# Altium PCB PCBinterface_cmv4000-de2.PcbDoc
Units mm, origin at the board's own origin, x right, y up, seen from the top; angles counter-clockwise.
Board outline 46.86 x 61.47 mm, 2 copper layers (Top Layer, Bottom Layer); 2 components, 20 nets, 82 pads, 0 vias.
Unrouted connection lines stored in the file: 1.
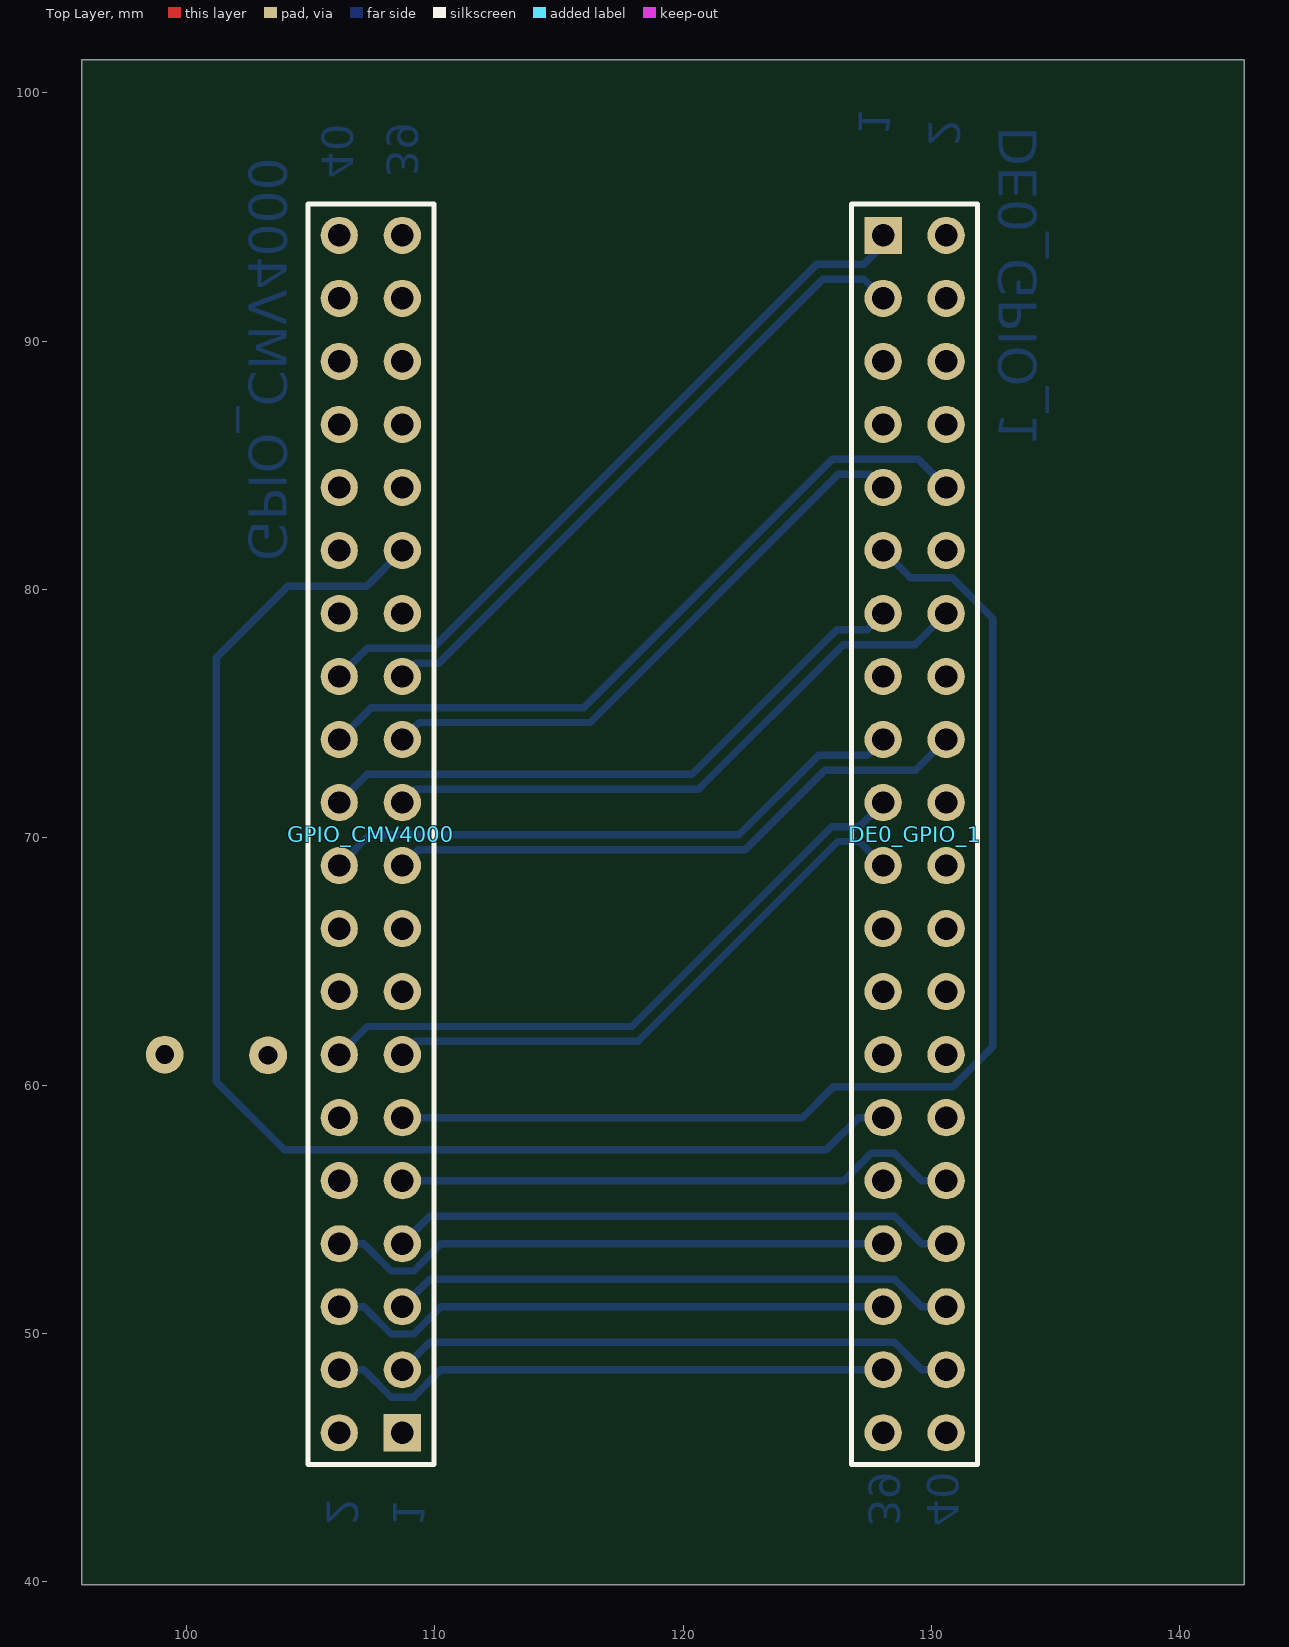
[diagram p0: Top Layer view]
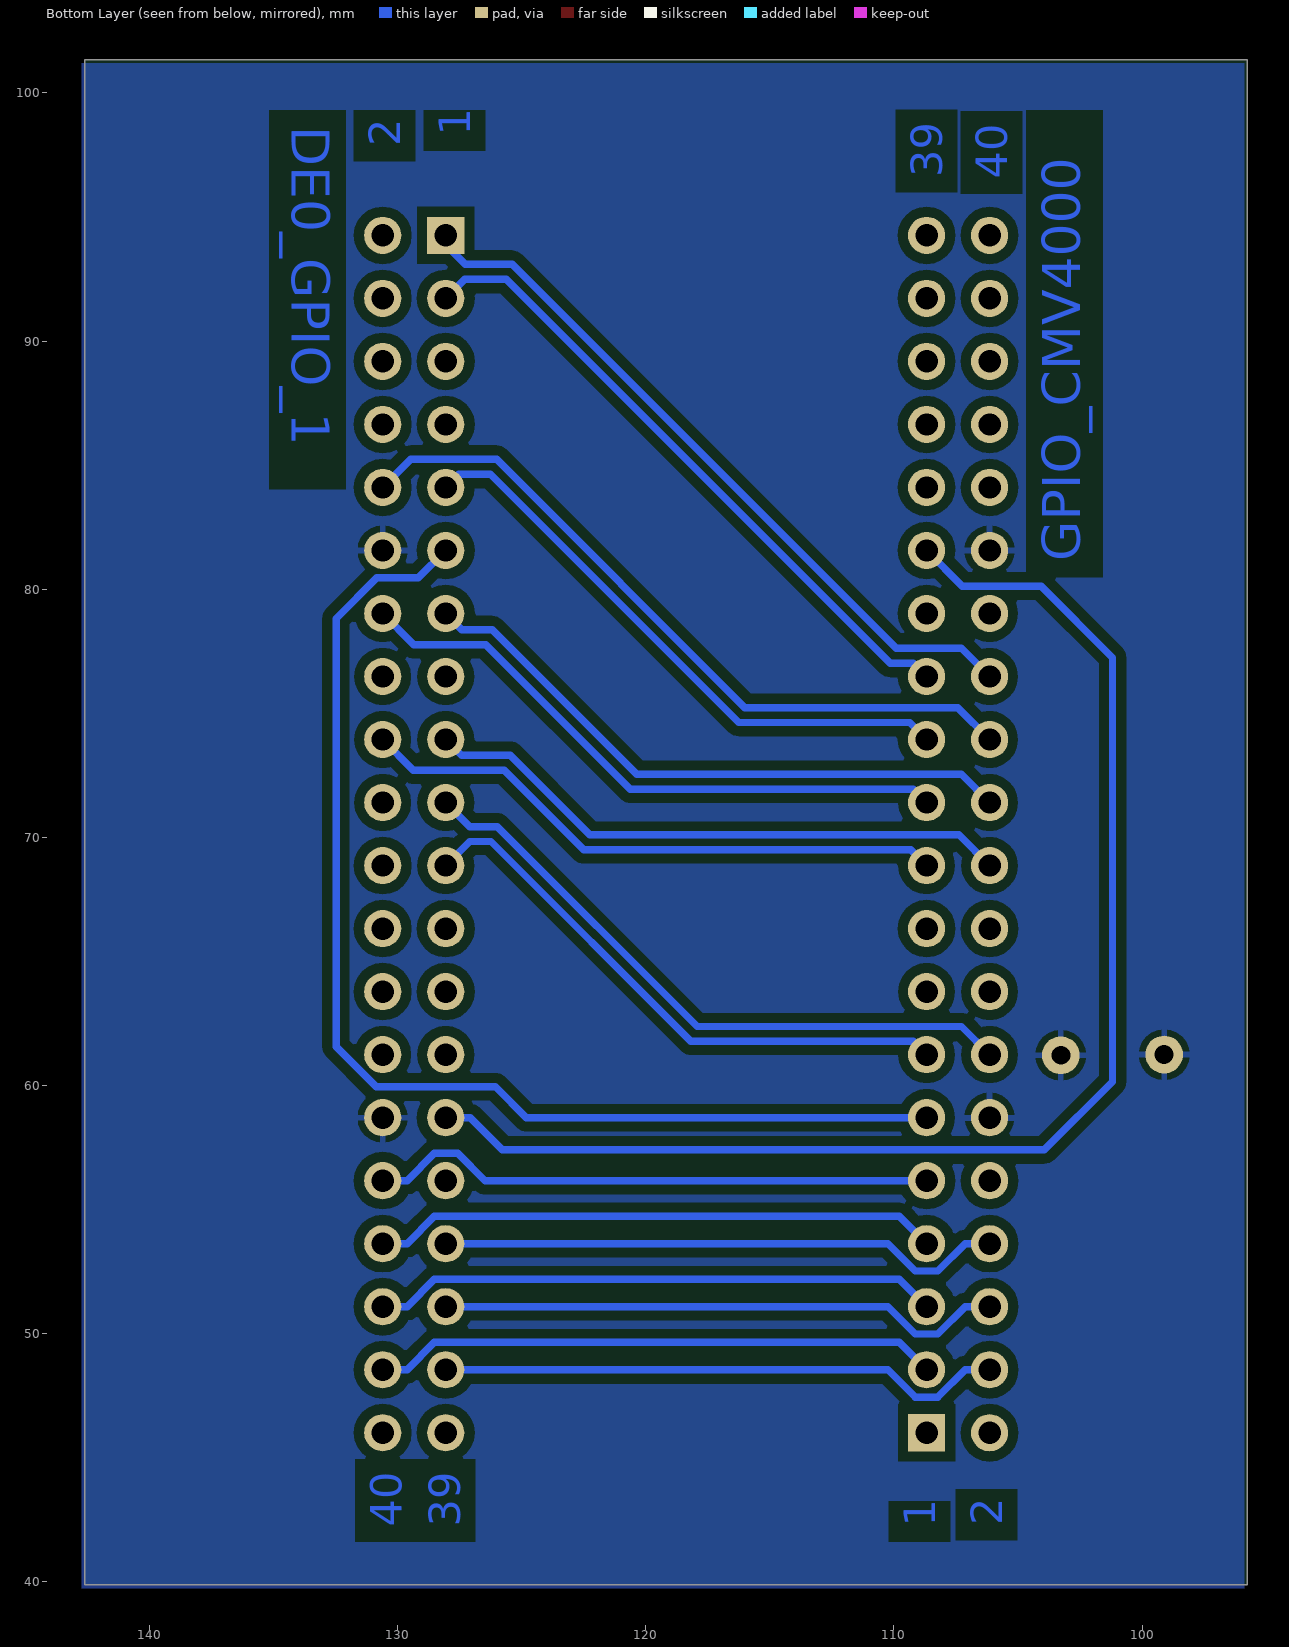
[diagram p1: Bottom Layer view, seen from below]

## Layer stack, top to bottom
Top Solder: solder mask 0.0102, Solder Resist, Dk 3.5
Top Layer: signal copper 0.0356
Dielectric 1: dielectric 0.32, FR-4, Dk 4.8
Bottom Layer: signal copper 0.0356
Bottom Solder: solder mask 0.0102, Solder Resist, Dk 3.5

## Board outline
95.758,39.878 142.621,39.878 142.621,101.346 95.758,101.346

## Design rules (kind name [scope] priority, off if disabled: settings)
Clearance [All] p1: gap=0.4
DiffPairsRouting [All] p1: maxlimit=0.3 minlimit=0.15 mostfreqgap=0.3 toplayer_minwidth=0.1 toplayer_maxwidth=0.3 toplayer_prefwidth=0.3 bottomlayer_minwidth=0.1 bottomlayer_maxwidth=0.3 bottomlayer_prefwidth=0.3 maxuncoupledlength=12.7
MatchedLengths [InNetClass('LVDS_signals')] p1: tolerance=25.4 checknetsindiffpair=TRUE checkdiffpairvsdiffpair=TRUE checkothers=TRUE
PolygonConnect [All] p1: connectstyle=Relief reliefconductorwidth=0.254 reliefentries=4 polygonreliefangle="90 Angle" airgapwidth=0.254
RoutingVias [All] p1: holewidth=0.711 width=1.27 viastyle="Through Hole" minholewidth=0.711 minwidth=1.27 maxholewidth=0.711 maxwidth=1.27
SolderMaskExpansion [All] p1: expansion=0.102
Width [All] p1: maxlimit=0.4 minlimit=0.1 preferedwidth=0.3 minimp=50.000000 maximp=50.000000 favimp=50.000000
28 further rules are at their usual default settings.

## Classes and differential pairs
differential pair OUTCTR: +OUTCTR_P -OUTCTR_N
differential pair OUTCLK: +OUTCLK_P -OUTCLK_N
differential pair OUT9: +OUT9_P -OUT9_N
differential pair OUT1: +OUT1_P -OUT1_N
differential pair LVDS_CLK: +LVDS_CLK_P -LVDS_CLK_N

## Components (designator, comment, footprint, x,y, rotation, side; value= is the part's Value field where it differs from the comment)
DE0_GPIO_1 "Header 20X2" HDR2X20 128.067,94.259 r270 top
GPIO_CMV4000 "Header 20X2" HDR2X20 108.687,45.999 r90 top

## Footprints (in the part's own frame and the unit in brackets; to place one, negate y for a bottom-side part, rotate by r counter-clockwise, add the part's x,y. Pads: shape width x height; smd on the part's side, far side on the other; paste and mask are expansions set on the pad)
HDR2X20 [mm] "Connector; Header; 20x2 Position"
  rect 1.5x1.5 hole 0.9: 1(0,0)
  round 1.5 hole 0.9: 2(0,2.54) 3(2.54,0) 4(2.54,2.54) 5(5.08,0) 6(5.08,2.54) 7(7.62,0) 8(7.62,2.54) 9(10.16,0) 10(10.16,2.54) 11(12.7,0) 12(12.7,2.54) 13(15.24,0) 14(15.24,2.54) 15(17.78,0) 16(17.78,2.54) 17(20.32,0) 18(20.32,2.54) 19(22.86,0) 20(22.86,2.54) 21(25.4,0) 22(25.4,2.54) 23(27.94,0) 24(27.94,2.54) 25(30.48,0) 26(30.48,2.54) 27(33.02,0) 28(33.02,2.54) 29(35.56,0) 30(35.56,2.54) 31(38.1,0) 32(38.1,2.54) 33(40.64,0) 34(40.64,2.54) 35(43.18,0) 36(43.18,2.54) 37(45.72,0) 38(45.72,2.54) 39(48.26,0) 40(48.26,2.54)
  silkscreen extent -1.27,-1.27 49.53,3.81

## Part data
DE0_GPIO_1 GPIO_CMV4000: "Header, 20-Pin, Dual row"

## Free pads (board coordinates)
  round 1.524 hole 0.762: 0(103.276,61.214) 1(99.111,61.239)

## Nets (pads, with @x,y where several pads share a name; then routed paths per layer and width w, separated by ;. In a path a pad name is that pad's centre, name@x,y a point inside that pad or via, vN(x,y) a via of type N, cw(c..) or ccw(c..) an arc to the next point about the centre after c; other vN are vias at no path point)
CLK_IN: DE0_GPIO_1.32 GPIO_CMV4000.9 | length 22.8
  Bottom Layer w0.3: GPIO_CMV4000.9 126.484,56.159 127.584,57.259 128.522,57.259 129.622,56.159 DE0_GPIO_1.32
FRAME_REQ: DE0_GPIO_1.34 GPIO_CMV4000.7 | length 22.8
  Bottom Layer w0.3: GPIO_CMV4000.7 109.787,54.719 128.522,54.719 129.622,53.619 DE0_GPIO_1.34
GND: DE0_GPIO_1.12 DE0_GPIO_1.30 GPIO_CMV4000.12 GPIO_CMV4000.30 pad.0 pad.1
LVDS_CLK_N: DE0_GPIO_1.19 GPIO_CMV4000.14 | length 26.1
  Bottom Layer w0.3: GPIO_CMV4000.14 107.28,62.373 117.938,62.373 125.994,70.429 127.097,70.429 DE0_GPIO_1.19
LVDS_CLK_P: DE0_GPIO_1.21 GPIO_CMV4000.13 | length 23.3
  Bottom Layer w0.3: GPIO_CMV4000.13 109.22,61.773 118.186,61.773 126.243,69.829 127.097,69.829 DE0_GPIO_1.21
OUT1_N: DE0_GPIO_1.17 GPIO_CMV4000.20 | length 24
  Bottom Layer w0.3: GPIO_CMV4000.20 107.382,70.094 122.256,70.094 125.466,73.304 127.432,73.304 DE0_GPIO_1.17
OUT1_P: DE0_GPIO_1.18 GPIO_CMV4000.19 | length 24
  Bottom Layer w0.3: GPIO_CMV4000.19 109.322,69.494 122.504,69.494 125.714,72.704 129.372,72.704 DE0_GPIO_1.18
OUT9_N: DE0_GPIO_1.10 GPIO_CMV4000.24 | length 29.6
  Bottom Layer w0.3: GPIO_CMV4000.24 107.432,75.225 116.007,75.225 126.015,85.233 129.473,85.233 DE0_GPIO_1.10
OUT9_P: DE0_GPIO_1.9 GPIO_CMV4000.23 | length 24
  Bottom Layer w0.3: GPIO_CMV4000.23 109.372,74.625 116.256,74.625 126.263,84.633 127.533,84.633 DE0_GPIO_1.9
OUTCLK_N: DE0_GPIO_1.1 GPIO_CMV4000.26 | length 29.5
  Bottom Layer w0.3: GPIO_CMV4000.26 107.28,77.613 109.906,77.613 125.384,93.091 127.279,93.091 128.067,93.878 DE0_GPIO_1.1
OUTCLK_P: DE0_GPIO_1.3 GPIO_CMV4000.25 | length 26.3
  Bottom Layer w0.3: GPIO_CMV4000.25 109.22,77.013 110.154,77.013 125.633,92.491 127.295,92.491 DE0_GPIO_1.3
OUTCTR_N: DE0_GPIO_1.13 GPIO_CMV4000.22 | length 25.1
  Bottom Layer w0.3: GPIO_CMV4000.22 107.28,72.533 120.361,72.533 126.198,78.37 127.417,78.37 DE0_GPIO_1.13
OUTCTR_P: DE0_GPIO_1.14 GPIO_CMV4000.21 | length 25.1
  Bottom Layer w0.3: GPIO_CMV4000.21 109.22,71.933 120.625,71.933 126.454,77.762 129.35,77.762 DE0_GPIO_1.14
SPI_CLK: DE0_GPIO_1.38 GPIO_CMV4000.3 | length 22.8
  Bottom Layer w0.3: GPIO_CMV4000.3 109.787,49.639 128.522,49.639 129.622,48.539 DE0_GPIO_1.38
SPI_EN: DE0_GPIO_1.35 GPIO_CMV4000.6 | length 22.8
  Bottom Layer w0.3: GPIO_CMV4000.6 107.131,51.079 108.231,49.979 109.142,49.979 110.242,51.079 DE0_GPIO_1.35
SPI_IN: DE0_GPIO_1.36 GPIO_CMV4000.5 | length 22.8
  Bottom Layer w0.3: GPIO_CMV4000.5 109.787,52.179 128.522,52.179 129.622,51.079 DE0_GPIO_1.36
SPI_OUT: DE0_GPIO_1.33 GPIO_CMV4000.8 | length 22.8
  Bottom Layer w0.3: GPIO_CMV4000.8 107.131,53.619 108.231,52.519 109.142,52.519 110.242,53.619 DE0_GPIO_1.33
SYS_RES_N: DE0_GPIO_1.37 GPIO_CMV4000.4 | length 22.8
  Bottom Layer w0.3: GPIO_CMV4000.4 107.131,48.539 108.231,47.439 109.142,47.439 110.242,48.539 DE0_GPIO_1.37
VCC5: DE0_GPIO_1.11 GPIO_CMV4000.11 | length 47.8
  Bottom Layer w0.3: GPIO_CMV4000.11 124.816,58.699 126.06,59.944 130.867,59.944 132.486,61.563 132.486,78.816 130.843,80.459 129.167,80.459 DE0_GPIO_1.11
VDD33: DE0_GPIO_1.29 GPIO_CMV4000.29 | length 54.9
  Bottom Layer w0.3: GPIO_CMV4000.29 107.247,80.119 104.072,80.119 101.194,77.241 101.194,60.147 103.937,57.404 125.781,57.404 127.076,58.699 DE0_GPIO_1.29
pads on no net: DE0_GPIO_1.2 DE0_GPIO_1.4 DE0_GPIO_1.5 DE0_GPIO_1.6 DE0_GPIO_1.7 DE0_GPIO_1.8 DE0_GPIO_1.15 DE0_GPIO_1.16 DE0_GPIO_1.20 DE0_GPIO_1.22 DE0_GPIO_1.23 DE0_GPIO_1.24 DE0_GPIO_1.25 DE0_GPIO_1.26 DE0_GPIO_1.27 DE0_GPIO_1.28 DE0_GPIO_1.31 DE0_GPIO_1.39 DE0_GPIO_1.40 GPIO_CMV4000.1 GPIO_CMV4000.2 GPIO_CMV4000.10 GPIO_CMV4000.15 GPIO_CMV4000.16 GPIO_CMV4000.17 GPIO_CMV4000.18 GPIO_CMV4000.27 GPIO_CMV4000.28 GPIO_CMV4000.31 GPIO_CMV4000.32 GPIO_CMV4000.33 GPIO_CMV4000.34 GPIO_CMV4000.35 GPIO_CMV4000.36 GPIO_CMV4000.37 GPIO_CMV4000.38 GPIO_CMV4000.39 GPIO_CMV4000.40

## Polygon pours and split planes (outlines as drawn)
GND on Bottom Layer "Bottom Layer-No Net" (solid, pour order 5): 95.882,101.192 142.745,101.192 142.745,39.724 95.882,39.724

## Other copper
Top Layer:
  text "J'ai fait la modif et renvoye a Sylvain" at 41.935,124.765 h10

## Silkscreen, mask and mechanical layers (free items; w line width, h text height)
Mechanical 1:
  lines w0.254: 95.758,39.751 95.758,101.346 142.824,101.346 142.824,39.751 95.758,39.751

## Text inside footprints (layer, text, board x,y; h text height)
DE0_GPIO_1: Bottom Layer "39" at 127.483,42.215 h1.27 r270; Bottom Layer "40" at 129.845,42.215 h1.27 r270; Bottom Layer "2" at 129.896,97.858 h1.27 r270; Bottom Layer "1" at 127.076,98.281 h1.27 r270
GPIO_CMV4000: Bottom Layer "39" at 108.052,96.596 h1.27 r270; Bottom Layer "40" at 105.435,96.545 h1.27 r270; Bottom Layer "2" at 105.639,42.266 h1.27 r270; Bottom Layer "1" at 108.331,42.215 h1.27 r270